# EAGLE board atmega8 (EAGLE 9.0.1)
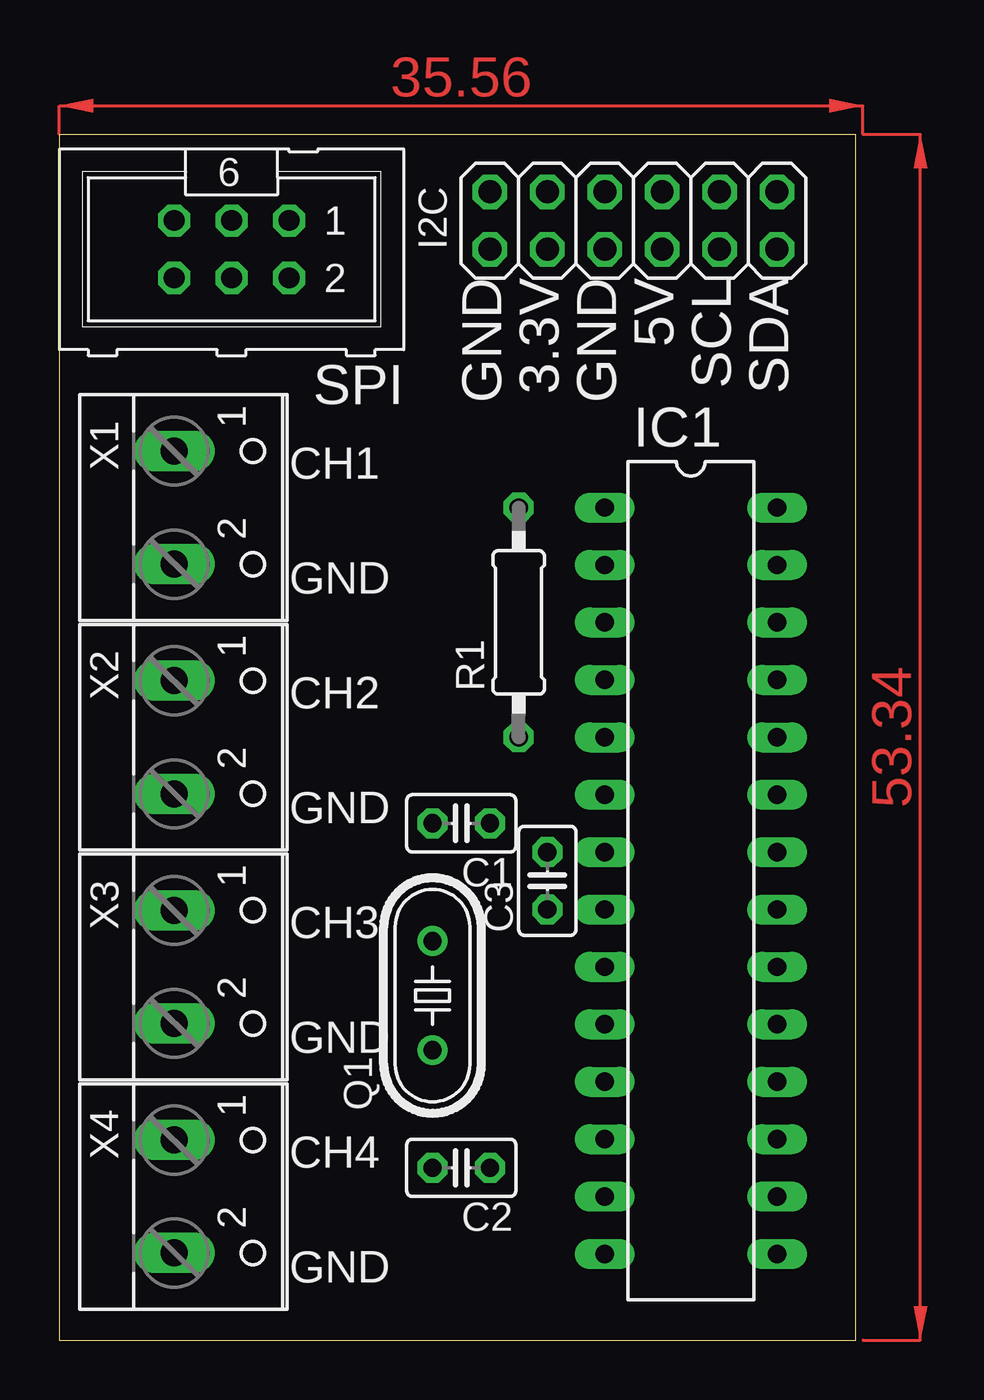
[diagram p0: board, top side]
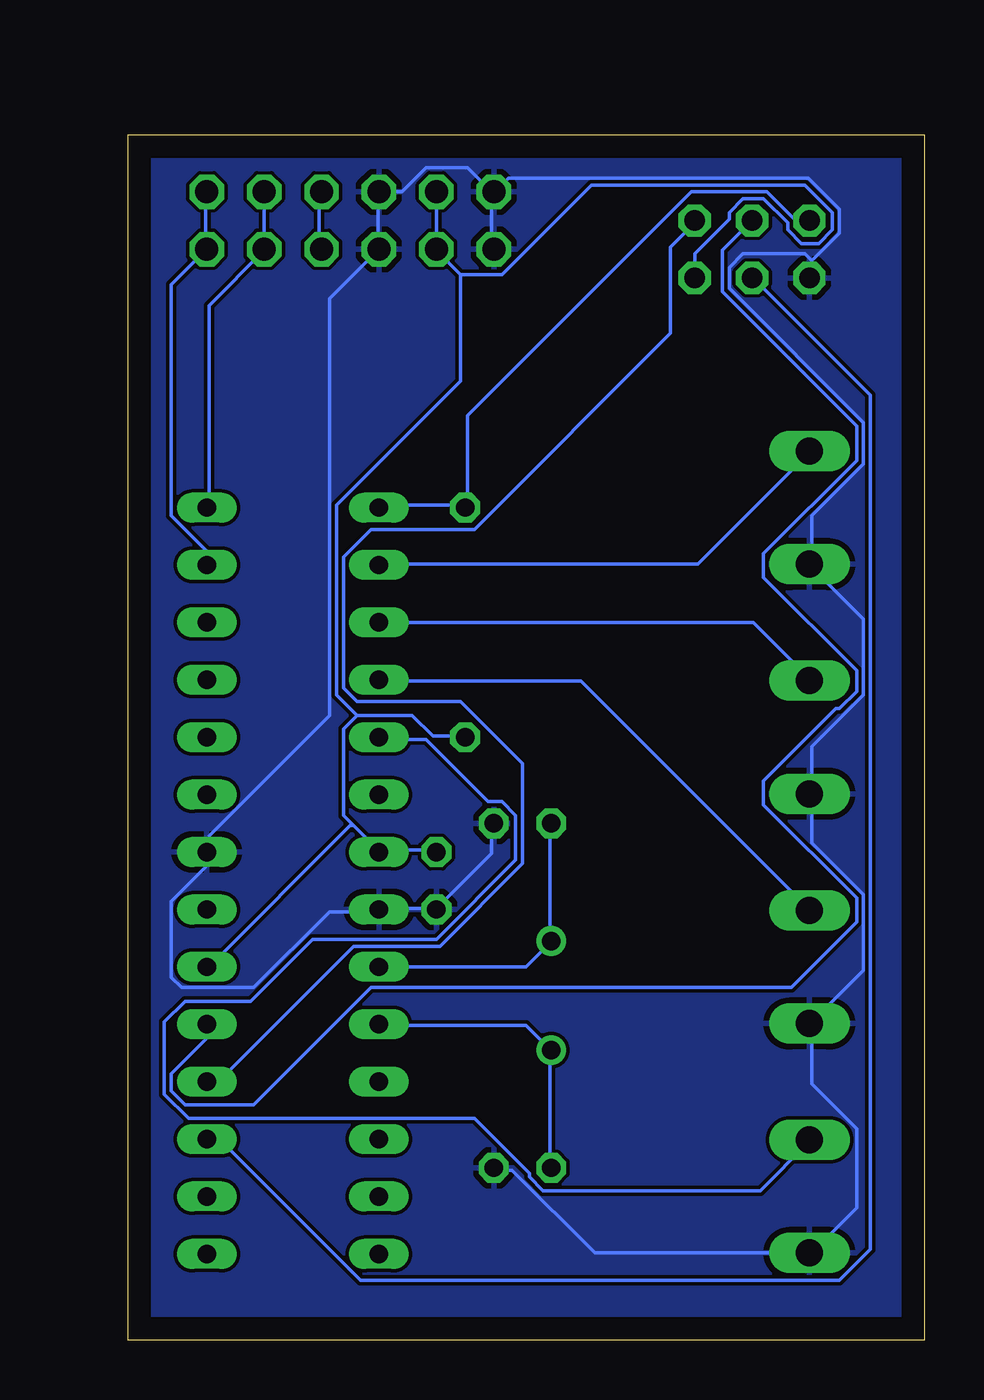
[diagram p1: board, bottom side, seen from below]

Size 35.23 x 53.33 mm. Coordinates in mm from the lower left corner, seen from the top.
Outline: 0,0 35.23,0 35.23,53.33 0,53.33 0,0
Copper layers (1*16): Top 0.035mm / dielectric 1.5mm / Bottom 0.035mm
Design rules "default": minimum track width 6mil, minimum drill 0.35mm, track to track 6mil, track to pad 6mil, pad to pad 6mil, via to via 6mil, smd to smd 6mil, copper to edge 40mil, drill to drill 6mil, minimum pad ring 10mil, minimum via ring 8mil, stop-mask expansion 4mil, vias tented up to drill 0mil, thermal gap 10mil

## Footprints (pad centres in the part's own frame; a part is rotated, then mirrored left to right if it is on the bottom)
C025-025X050 = drill 0.813 octagon: 1 -1.27,0; 2 1.27,0
2X06 = drill 1.016 octagon: 1 -6.35,-1.27; 2 -6.35,1.27; 3 -3.81,-1.27; 4 -3.81,1.27; 5 -1.27,-1.27; 6 -1.27,1.27; 7 1.27,-1.27; 8 1.27,1.27; 9 3.81,-1.27; 10 3.81,1.27; 11 6.35,-1.27; 12 6.35,1.27
DIL28-3 = drill 0.813 long: 1 -16.51,-3.81; 2 -13.97,-3.81; 3 -11.43,-3.81; 4 -8.89,-3.81; 5 -6.35,-3.81; 6 -3.81,-3.81; 7 -1.27,-3.81; 8 1.27,-3.81; 9 3.81,-3.81; 10 6.35,-3.81; 11 8.89,-3.81; 12 11.43,-3.81; 13 13.97,-3.81; 14 16.51,-3.81; 15 16.51,3.81; 16 13.97,3.81; 17 11.43,3.81; 18 8.89,3.81; 19 6.35,3.81; 20 3.81,3.81; 21 1.27,3.81; 22 -1.27,3.81; 23 -3.81,3.81; 24 -6.35,3.81; 25 -8.89,3.81; 26 -11.43,3.81; 27 -13.97,3.81; 28 -16.51,3.81
HC49/S = drill 0.813: 1 -2.413,0; 2 2.413,0
0207/10 = drill 0.813 octagon: 1 -5.08,0; 2 5.08,0
ML6 = drill 0.914 octagon: 1 -2.54,-1.27; 2 -2.54,1.27; 3 0,-1.27; 4 0,1.27; 5 2.54,-1.27; 6 2.54,1.27
W237-102 = drill 1.194 long: 1 -2.5,-1.27; 2 2.5,-1.27

## Placement (x,y rotation side)
C1  22p  [C025-025X050]  17.78,22.86 180 top
C2  22p  [C025-025X050]  17.78,7.62 180 top
C3  100n  [C025-025X050]  21.59,20.32 90 top
I2C  [2X06]  25.4,49.53 180 top
IC1  MEGA8-P  [DIL28-3]  27.94,20.32 270 top
Q1  12m  [HC49/S]  16.51,15.24 90 top
R1  10k  [0207/10]  20.32,31.75 90 top
SPI  [ML6]  7.62,48.26 180 top
X1  [W237-102]  6.35,36.83 270 top
X2  [W237-102]  6.35,26.67 270 top
X3  [W237-102]  6.35,16.51 270 top
X4  [W237-102]  6.35,6.35 270 top

## Library data of the parts
C1-C3 = rcl
I2C = pinhead
IC1 = atmel; OC_FARNELL: unknown; OC_NEWARK: unknown
Q1 = crystal; OC_FARNELL: 1667008; OC_NEWARK: unknown
R1 = resistor
SPI = con-ml; OC_FARNELL: unknown; OC_NEWARK: unknown
X1-X4 = con-wago-500; MPN: 237-102; OC_FARNELL: unknown; OC_NEWARK: 70K9898

## Nets
+3V3: C3.2 I2C.9 I2C.10 IC1.7 IC1.20 R1.1 SPI.2
+5V: I2C.5 I2C.6
CHANNEL1: IC1.2 X1.1
CHANNEL2: IC1.3 X2.1
CHANNEL3: IC1.4 X3.1
CHANNEL4: IC1.5 X4.1
GND: C1.1 C2.1 C3.1 I2C.7 I2C.8 I2C.11 I2C.12 IC1.8 IC1.22 SPI.6 X1.2 X2.2 X3.2 X4.2
IO13: IC1.18 SPI.1
IO14: IC1.17 SPI.4
N$1: C2.2 IC1.10 Q1.1
N$2: C1.2 IC1.9 Q1.2
N$4: IC1.19 SPI.3
RESET: IC1.1 R1.2 SPI.5
SCL: I2C.3 I2C.4 IC1.28
SDA: I2C.1 I2C.2 IC1.27

## Tracks (layer width: path | path; a pad name or v marks a point on that pad's centre or on a via)
+3V3
  Bottom 0.152: SPI.2 10.16,48.06 8.64,49.58 8.64,49.89 8.03,50.49 7.11,50.49 6.04,49.43 6.04,49.12 5.44,48.51 4.67,48.51 4.06,49.12 4.06,49.89 5.28,51.1 14.73,51.1 18.69,47.14 20.52,47.14 | 20.52,47.14 21.59,48.21 I2C.10 I2C.9 | C3.2 21.59,21.69 24.03,21.69 IC1.7 24.18,21.69 25.25,22.76 | 25.09,27.63 22.66,27.63 21.74,26.72 20.37,26.72 R1.1 | 25.09,27.63 25.71,27.03 25.71,23.22 25.25,22.76 | 25.25,22.76 25.4,22.76 31.65,16.51 IC1.20 | 20.52,47.14 20.52,42.42 26.01,36.93 26.01,28.55 25.09,27.63
+5V
  Bottom 0.152: I2C.6 26.77,48.36 26.77,50.8 I2C.5
CHANNEL1
  Bottom 0.152: IC1.2 24.03,34.34 10.01,34.34 5.13,39.22 X1.1
CHANNEL2
  Bottom 0.152: IC1.3 7.57,31.75 5.13,29.31 X2.1
CHANNEL3
  Bottom 0.152: IC1.4 24.03,29.16 15.19,29.16 5.13,19.1 X3.1
CHANNEL4
  Bottom 0.152: IC1.5 24.03,26.57 22.05,26.57 19.3,23.83 18.69,23.83 18.08,23.22 18.08,21.23 21.59,17.73 27.08,17.73 29.82,14.99 32.72,14.99 33.63,14.07 33.63,10.87 32.56,9.8 19.91,9.8 17.47,7.37 17.47,7.21 16.87,6.6 7.26,6.6 5.13,8.74 X4.1
GND
  Bottom 0.152: C2.1 19,7.52 18.24,7.52 14.58,3.86 5.13,3.86 X4.2 4.98,3.86 3,5.84 3,9.35 4.98,11.33 4.98,13.92 X3.2 4.98,14.07 2.69,16.36 2.69,19.71 4.98,22 4.98,24.13 X2.2 4.98,24.28 4.98,26.26 2.69,28.55 2.69,31.9 4.98,34.19 X1.2 4.98,34.34 4.98,36.47 2.69,38.76 2.69,40.59 8.64,46.53 8.64,47.45 8.03,48.06 5.28,48.06 4.98,47.75 | 21.59,19.1 24.03,19.1 IC1.8 24.18,18.95 26.31,18.95 29.67,15.6 32.87,15.6 33.33,16.05 33.33,19.41 31.8,20.93 31.8,21.54 IC1.22 31.65,21.69 31.65,22.3 26.31,27.63 26.31,46.08 I2C.8 24.18,48.36 24.18,50.8 I2C.7 23.11,50.8 22.05,51.87 20.22,51.87 19.15,50.8 | 21.59,19.1 19.15,21.54 19.15,22.76 C1.1 | 21.59,19.1 C3.1 | 4.98,47.75 4.98,46.99 SPI.6 | 4.98,47.75 3.76,48.97 3.76,50.04 5.13,51.41 18.39,51.41 19,50.8 I2C.11 19.15,50.8 | 19.15,50.8 19.15,48.36 I2C.12
  pour Bottom: 0,53.34 35.56,53.34 35.56,0 0,0
IO13
  Bottom 0.152: IC1.18 31.65,11.48 31.19,11.48 25.25,17.42 21.44,17.42 17.78,21.08 17.78,25.5 20.52,28.25 25.09,28.25 25.71,28.85 25.71,34.65 24.49,35.87 19.91,35.87 11.23,44.55 11.23,48.36 10.16,49.43 SPI.1
IO14
  Bottom 0.152: IC1.17 31.19,8.89 24.94,2.64 3.76,2.64 2.39,4.01 2.39,41.81 7.57,46.99 SPI.4
N$1
  Bottom 0.152: C2.2 16.56,7.67 16.56,12.7 Q1.1 16.56,12.85 17.63,13.92 24.03,13.92 IC1.10
N$2
  Bottom 0.152: C1.2 16.56,22.76 16.56,17.73 Q1.2 16.56,17.58 17.63,16.51 IC1.9
N$4
  Bottom 0.152: SPI.3 8.94,48.21 8.94,46.38 3,40.44 3,38.91 7.11,34.8 7.11,33.73 3,29.62 3,28.7 3.76,27.94 3.91,27.94 7.11,24.74 7.11,23.67 3,19.56 3,18.49 5.89,15.6 24.49,15.6 29.67,10.41 32.72,10.41 33.33,11.02 33.33,11.79 31.8,13.31 31.8,13.92 IC1.19
RESET
  Bottom 0.152: IC1.1 24.03,36.93 20.37,36.93 R1.2 20.22,36.93 20.22,40.89 10.31,50.8 6.96,50.8 5.74,49.58 5.13,49.58 SPI.5
SCL
  Bottom 0.152: IC1.28 31.65,36.93 31.65,45.77 29.21,48.21 I2C.4 I2C.3
SDA
  Bottom 0.152: IC1.27 31.8,34.34 31.8,34.95 33.33,36.47 33.33,46.68 I2C.2 31.8,48.36 31.8,50.8 I2C.1
(copper drawn outside any net)
  shapes: Top area x2

## Text on the board
tNames: GND | 3.3V | GND | 5V | SCL | SDA | CH1 | GND | CH2 | GND | CH3 | GND | CH4 | GND